# Altium PCB PCB1.PcbDoc
Units mil, origin at the board's own origin, x right, y up, seen from the top; angles counter-clockwise.
Board outline 1200 x 1400 mil, 2 copper layers (Top Layer, Bottom Layer); 43 components, 36 nets, 131 pads, 8 vias.
Unrouted connection lines stored in the file: 1.
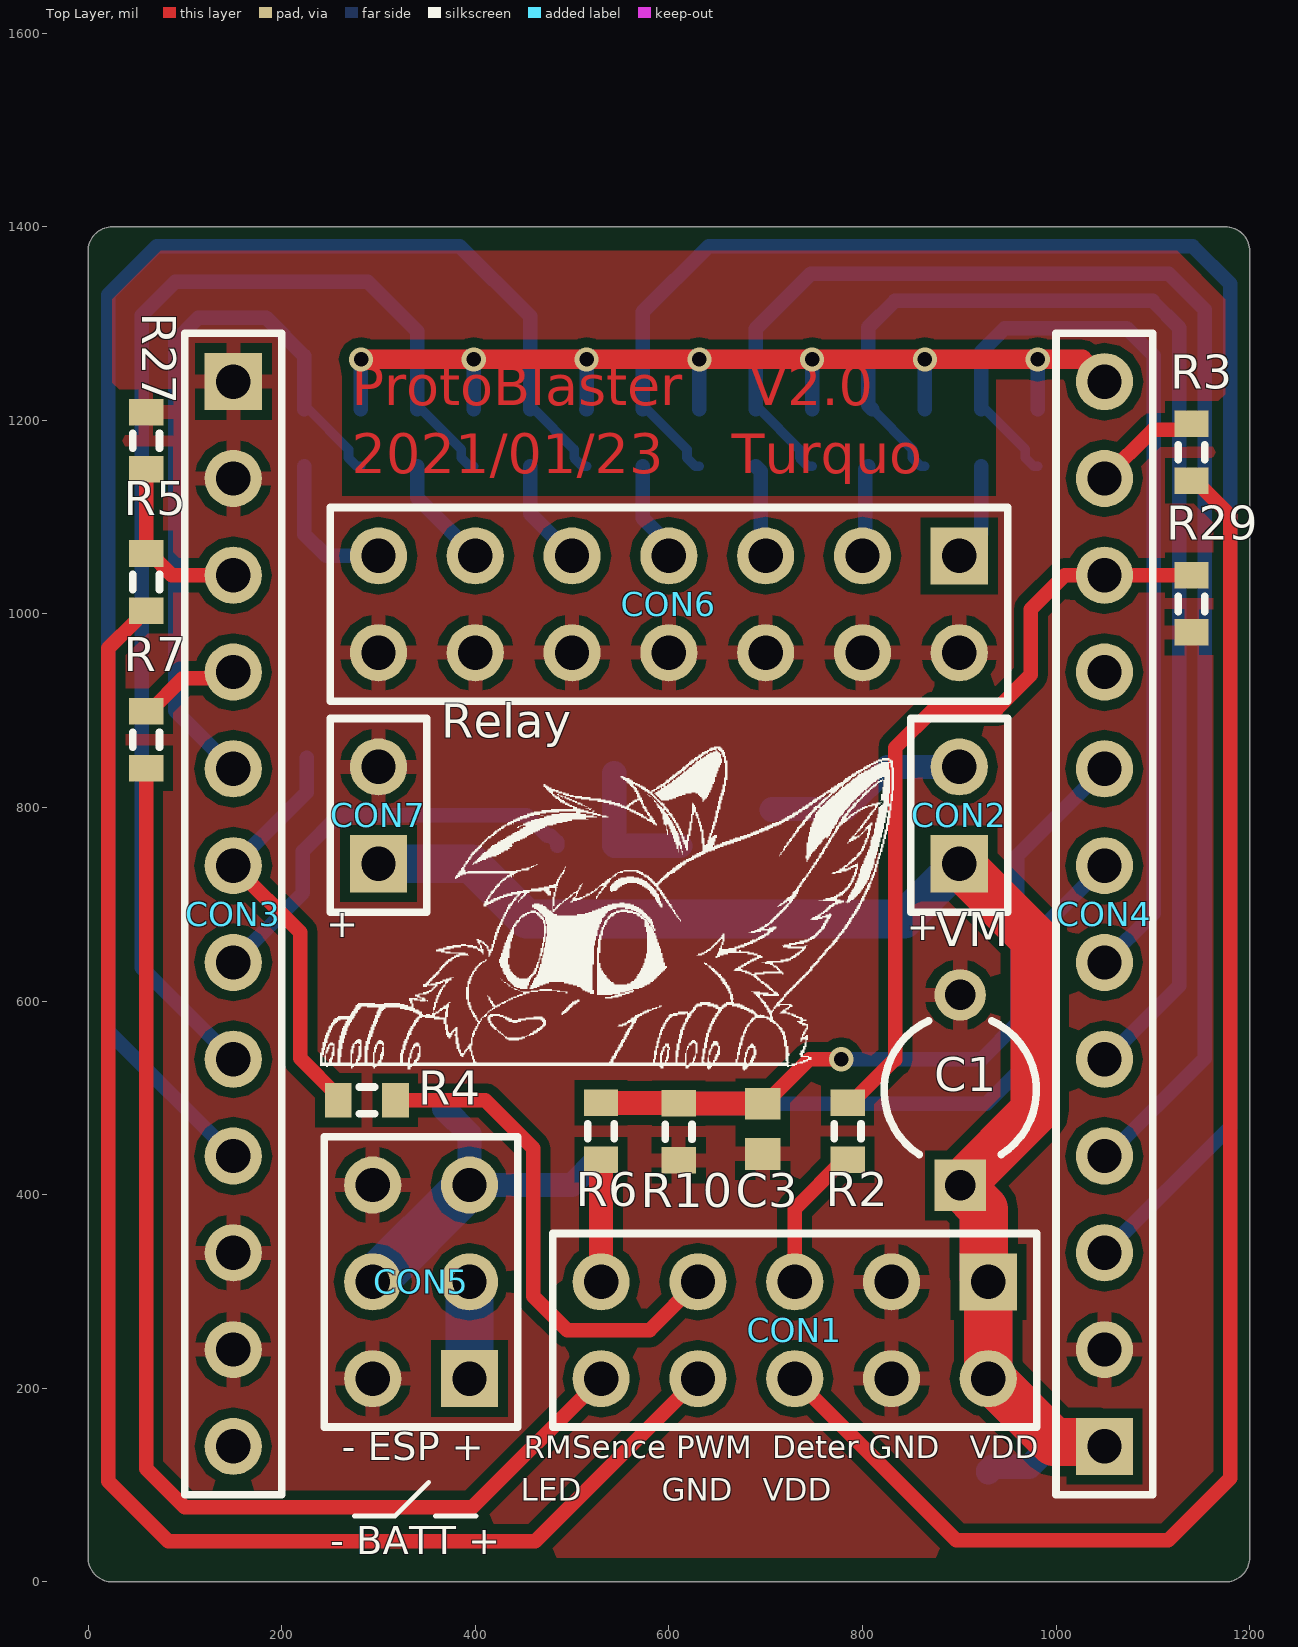
[diagram p0: Top Layer view]
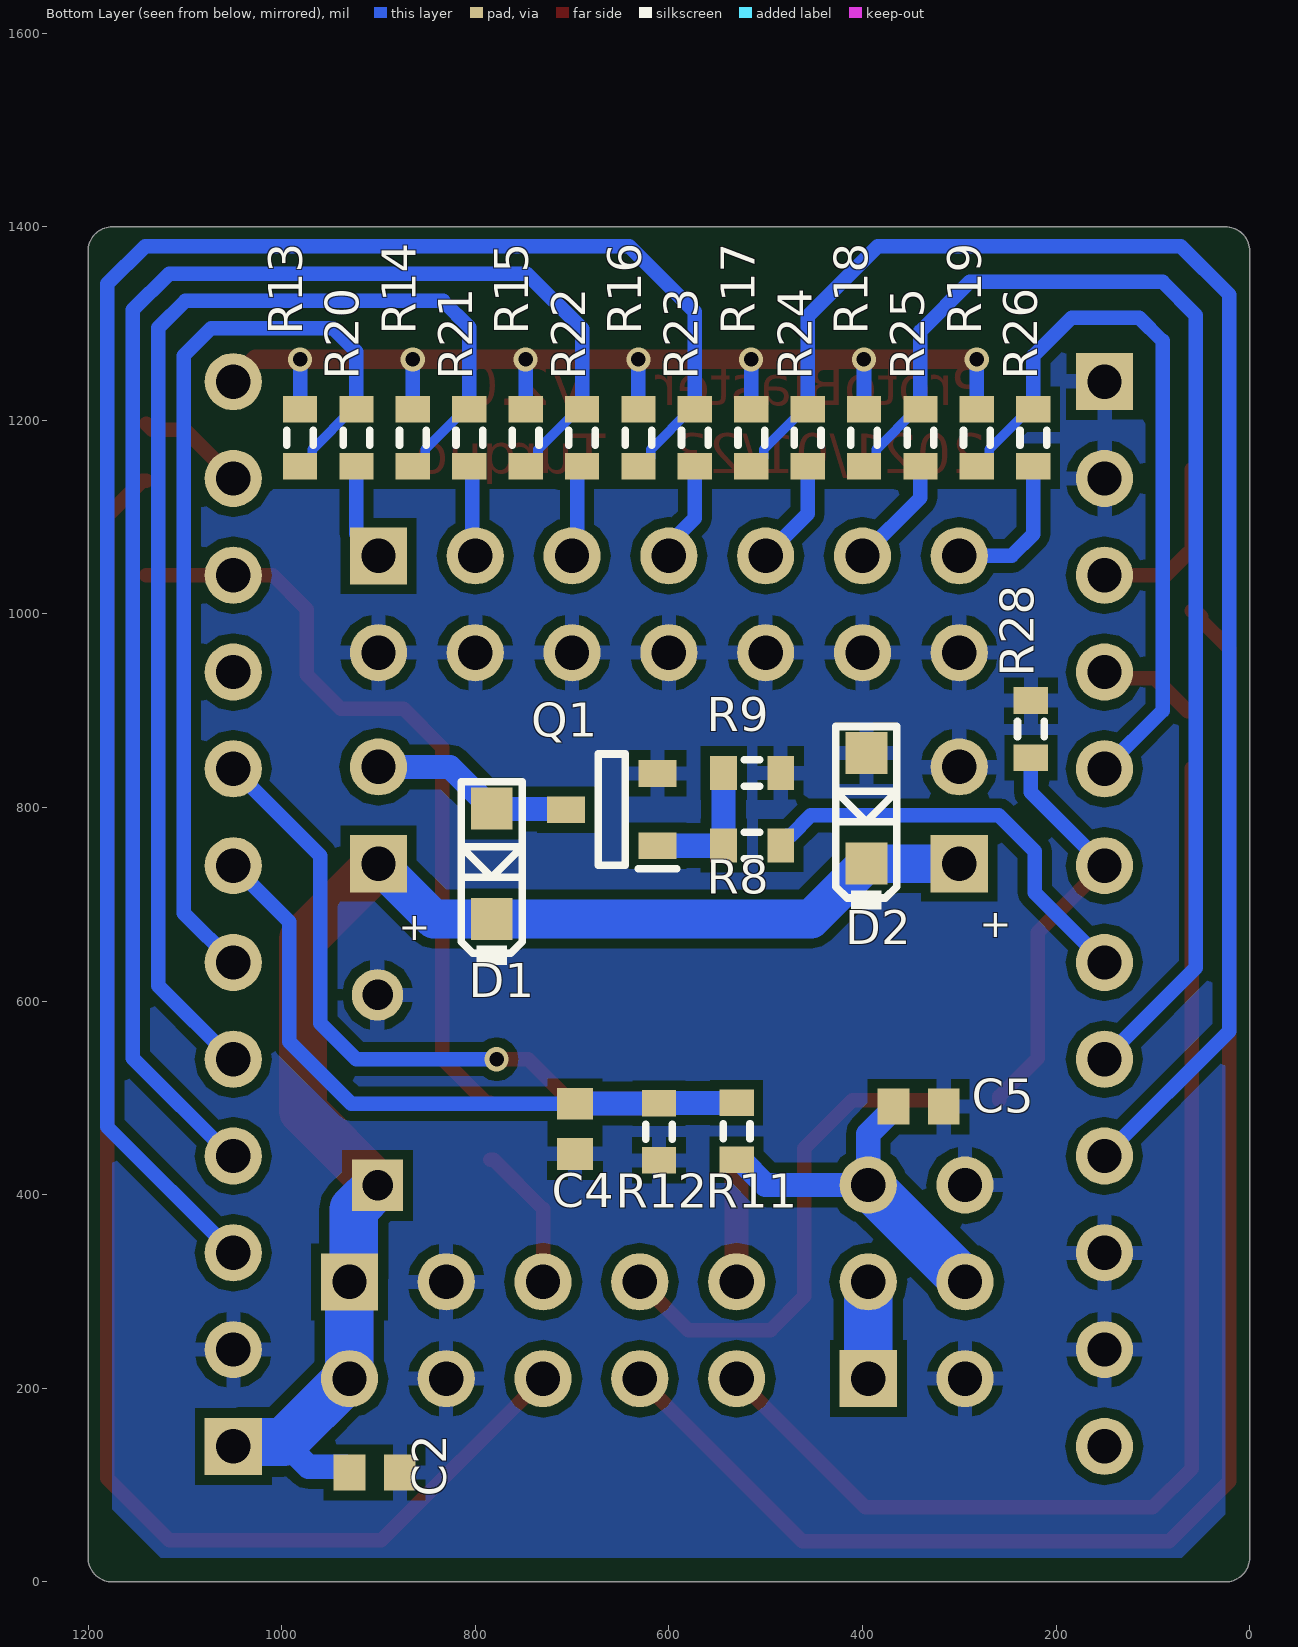
[diagram p1: Bottom Layer view, seen from below]

## Layer stack, top to bottom
Top Solder: solder mask 0.4, Solder Resist, Dk 3.5
Top Layer: signal copper 1.4
Dielectric 1: dielectric 12.6, FR-4, Dk 4.8
Bottom Layer: signal copper 1.4
Bottom Solder: solder mask 0.4, Solder Resist, Dk 3.5

## Board outline
25,0 cw(c25,25) 0,25 0,1375 cw(c25,1375) 25,1400 1175,1400 cw(c1175,1375) 1200,1375 1200,25 cw(c1175,25) 1175,0

## Design rules (kind name [scope] priority, off if disabled: settings)
Clearance [All] p1: gap=10 ignorepadtopadclearanceinfootprint=FALSE except(0: Arc-Hole Track-Hole SMDPad-Hole THPad-Hole Via-Hole Fill-Hole Poly-Hole Region-Hole Text-Hole)
PolygonConnect [All] p1: connectstyle=Relief reliefconductorwidth=15 reliefentries=4 polygonreliefangle="90 Angle" airgapwidth=10
RoutingVias [All] p1: holewidth=28 width=50 viastyle="Through Hole" minholewidth=28 minwidth=50 maxholewidth=28 maxwidth=50
SolderMaskExpansion [All] p1: expansion=4
Width [All] p1: maxlimit=100 minlimit=1 preferedwidth=30 minimp=50.000000 maximp=50.000000 favimp=50.000000
30 further rules are at their usual default settings.

## Components (designator, comment, footprint, x,y, rotation, side; value= is the part's Value field where it differs from the comment)
C1 "Cap2" CAPR5-4X5 901,508 r90 top value=2200pF/10V
C2 "104P" CAPC1608X90N 904,113 r180 bottom
C3 "104P" CAPC1608X90N 697,468 r270 top
C4 "104P" CAPC1608X90N 697,468 r270 bottom
C5 "104P" CAPC1608X90N 342,491 r180 bottom
CON1 "Blaster" HDR2X5 930,310 r180 top
CON2 "VM" HDR1X2 900,742 r90 top
CON3 "ESP32_L" HDR1X12 150,1240 r270 top locked
CON4 "ESP32_R" HDR1X12 1050,140 r90 top locked
CON5 "Battery" HDR2X3 394,210 r90 top
CON6 "Button" HDR2X7 900,1060 r180 top
CON7 "Relay" HDR1X2 300,742 r90 top
D1 "1N4007" D3216 783,684.83 r270 bottom
D2 "1N4007" D3216 396,742 r270 bottom
Q1 "BSS138" SOT95P240X120-3N 659,797.79 r0 bottom
R2 "Res3" J1-0603 784.69,465.53 r270 top value=100
R3 "Res3" J1-0603 1140,1167 r90 top value=100
R4 "Res3" J1-0603 288,497.57 r0 top value=100
R5 "Res3" J1-0603 60,1033 r90 top value=100
R6 "Res3" J1-0603 529.98,465.53 r270 top value=15K
R7 "Res3" J1-0603 60,870 r90 top value=100
R8 "Res3" J1-0603 514,760.79 r180 bottom value=1K
R9 "Res3" J1-0603 514,835.79 r180 bottom value=10K
R10 "Res3" J1-0603 610.17,465.06 r270 top value=1K
R11 "Res3" J1-0603 529.98,465.53 r270 bottom value=15K
R12 "Res3" J1-0603 610.17,465.06 r270 bottom value=1K
R13 "Res3" J1-0603 981,1182 r270 bottom value=10K
R14 "Res3" J1-0603 864.46,1182 r270 bottom value=10K
R15 "Res3" J1-0603 747.93,1182 r270 bottom value=10K
R16 "Res3" J1-0603 631.39,1182 r270 bottom value=10K
R17 "Res3" J1-0603 514.85,1182 r270 bottom value=10K
R18 "Res3" J1-0603 398.31,1182 r270 bottom value=10K
R19 "Res3" J1-0603 281.78,1182 r270 bottom value=10K
R20 "Res3" J1-0603 922.73,1182 r270 bottom value=100
R21 "Res3" J1-0603 806.19,1182 r270 bottom value=100
R22 "Res3" J1-0603 689.66,1182 r270 bottom value=100
R23 "Res3" J1-0603 573.12,1182 r270 bottom value=100
R24 "Res3" J1-0603 456.58,1182 r270 bottom value=100
R25 "Res3" J1-0603 340.05,1182 r270 bottom value=100
R26 "Res3" J1-0603 223.51,1182 r270 bottom value=100
R27 "Res3" J1-0603 60,1179 r90 top value=10K
R28 "Res3" J1-0603 226,881 r90 bottom value=10K
R29 "Res3" J1-0603 1140,1010.47 r270 top value=10K

## Footprints (in the part's own frame and the unit in brackets; to place one, negate y for a bottom-side part, rotate by r counter-clockwise, add the part's x,y. Pads: shape width x height; smd on the part's side, far side on the other; paste and mask are expansions set on the pad)
CAPC1608X90N [mm]
  rect 0.83x0.94 smd: 1(-0.66,0) 2(0.66,0)
  body extent -0.8,-0.4 0.8,0.4, height 0.9
CAPR5-4X5 [mm] "Capacitor; 2 Leads"
  rect 1.35x1.35 hole 0.8: 1(-2.5,0)
  round 1.35 hole 0.8: 2(2.5,0)
  silkscreen extent -1.69,-2 1.82,2
D3216 [mm]
  rect 1.1x1.1 smd: A(-2.9,0) K(0,0)
  silkscreen extent -3.6,-0.8 1.2,0.8
HDR1X2 [mm] "Connector; Header; 2 Position"
  rect 1.5x1.5 hole 0.9: 1(0,0)
  round 1.5 hole 0.9: 2(2.54,0)
  silkscreen extent -1.27,-1.27 3.81,1.27
HDR1X12 [mm] "Connector; Header; 12 Position"
  rect 1.5x1.5 hole 0.9: 1(0,0)
  round 1.5 hole 0.9: 2(2.54,0) 3(5.08,0) 4(7.62,0) 5(10.16,0) 6(12.7,0) 7(15.24,0) 8(17.78,0) 9(20.32,0) 10(22.86,0) 11(25.4,0) 12(27.94,0)
  silkscreen extent -1.27,-1.27 29.21,1.27
HDR2X3 [mm] "Connector; Header; 3x2 Position"
  rect 1.5x1.5 hole 0.9: 1(0,0)
  round 1.5 hole 0.9: 2(0,2.54) 3(2.54,0) 4(2.54,2.54) 5(5.08,0) 6(5.08,2.54)
  silkscreen extent -1.27,-1.27 6.35,3.81
HDR2X5 [mm] "Connector; Header; 5x2 Position"
  rect 1.5x1.5 hole 0.9: 1(0,0)
  round 1.5 hole 0.9: 2(0,2.54) 3(2.54,0) 4(2.54,2.54) 5(5.08,0) 6(5.08,2.54) 7(7.62,0) 8(7.62,2.54) 9(10.16,0) 10(10.16,2.54)
  silkscreen extent -1.27,-1.27 11.43,3.81
HDR2X7 [mm] "Connector; Header; 7x2 Position"
  rect 1.5x1.5 hole 0.9: 1(0,0)
  round 1.5 hole 0.9: 2(0,2.54) 3(2.54,0) 4(2.54,2.54) 5(5.08,0) 6(5.08,2.54) 7(7.62,0) 8(7.62,2.54) 9(10.16,0) 10(10.16,2.54) 11(12.7,0) 12(12.7,2.54) 13(15.24,0) 14(15.24,2.54)
  silkscreen extent -1.27,-1.27 16.51,3.81
J1-0603 [mm] "Chip Resistor, Body 1.6x0.8mm, IPC High Density"
  rect 0.7x0.9 smd: 1(-0.75,0) 2(0.75,0)
  silkscreen extent -0.2,-0.35 0.2,0.35, body extent -0.85,-0.48 0.85,0.48, height 0.9
SOT95P240X120-3N [mm]
  rect 1x0.7 smd: 1(-1.2,0.95) 2(-1.2,-0.95) 3(1.2,0)
  silkscreen extent -1.7,-1.46 0.35,1.55, body extent -1.2,-1.46 1.2,1.46, height 1.2

## Part data
C1: "Capacitor", PackageDescription="Capacitor; 2 Leads", PackageReference=CAPR5-4X5, Published=23-Sep-2002, Publisher="Altium Limited"
C2 C3 C4 C5: library part CC0603KRX7R7BB103, "Capacitor", Manufacturer_Name="YAGEO (PHYCOMP)", Mouser Part Number=603-CC603KRX7R7BB103, Arrow Part Number=CC0603KRX7R7BB103, Arrow Price/Stock=https://www.arrow.com/en/products/cc0603krx7r7bb103/yageo, Datasheet Link=http://www.yageo.com/documents/recent/UPY-GPHC_X7R_6.3V-to-50V_18.pdf, Height=0.9mm, Manufacturer_Part_Number=CC0603KRX7R7BB103, Mouser Price/Stock=https://www.mouser.co.uk/ProductDetail/Yageo/CC0603KRX7R7BB103?qs=5q%252BqlK8CmJRarFmz5k060w%3D%3D
CON1: library part "Header 5X2", "Header, 5-Pin, Dual row", LatestRevisionDate=17-Jul-2002, LatestRevisionNote="Re-released for DXP Platform.", Publisher="Altium Limited"
CON2 CON7: library part "Header 2", "Header, 2-Pin", LatestRevisionDate=17-Jul-2002, LatestRevisionNote="Re-released for DXP Platform.", Publisher="Altium Limited"
CON3 CON4: library part "Header 12", "Header, 12-Pin", LatestRevisionDate=17-Jul-2002, LatestRevisionNote="Re-released for DXP Platform.", Publisher="Altium Limited"
CON5: library part "Header 3X2", "Header, 3-Pin, Dual row", LatestRevisionDate=17-Jul-2002, LatestRevisionNote="Re-released for DXP Platform.", Publisher="Altium Limited"
CON6: library part "Header 7X2", "Header, 7-Pin, Dual row", LatestRevisionDate=17-Jul-2002, LatestRevisionNote="Re-released for DXP Platform.", Publisher="Altium Limited"
D1 D2: library part SMD-D
Q1: "MOSFET (N-Channel)", Manufacturer_Name="ON Semiconductor", Mouser Part Number=512-BSS138, Arrow Part Number=BSS138, Arrow Price/Stock=https://www.arrow.com/en/products/bss138/on-semiconductor, Datasheet Link=https://www.onsemi.com/pub/Collateral/BSS138-D.PDF, Height=1.2mm, Manufacturer_Part_Number=BSS138, Mouser Price/Stock=https://www.mouser.co.uk/ProductDetail/ON-Semiconductor-Fairchild/BSS138?qs=HK%252BeIG1iaahCeqBvjB4arg%3D%3D
R2 R3 R4 R5 R6 R7 R8 R9 R10 R11 R12 R13 R14 R15 R16 R17 R18 R19 R20 R21 R22 R23 R24 R25 R26 R27 R28 R29: "Resistor", LatestRevisionDate=29-May-2009, LatestRevisionNote="IPC-7351 Footprint Added.", PackageDescription="Chip Resistor", PackageReference=J1-0603, Published=8-Jun-2000, Publisher="Altium Limited"

## Via types
v1: diameter 25, hole 15, Top Layer to Bottom Layer, 8 vias

## Nets (pads, with @x,y where several pads share a name; then routed paths per layer and width w, separated by ;. In a path a pad name is that pad's centre, name@x,y a point inside that pad or via, vN(x,y) a via of type N, cw(c..) or ccw(c..) an arc to the next point about the centre after c; other vN are vias at no path point)
3V3: CON4.12 R13.1 R14.1 R15.1 R16.1 R17.1 R18.1 R19.1 | length 1138.2
  Top Layer w20: v1(282,1263) v1(398.5,1263) v1(515,1263) v1(631.5,1263) v1(748,1263) v1(864.5,1263) v1(981,1263) 1027,1263 CON4.12
  Bottom Layer w15: R19.1 281.89,1211.64 281.89,1262.89 v1(282,1263) ; R18.1 398.41,1211.62 398.41,1262.91 v1(398.5,1263) ; R17.1 514.93,1211.6 514.93,1262.93 v1(515,1263) ; R16.1 631.44,1211.58 631.44,1262.94 v1(631.5,1263) ; v1(748,1263) v1(748,1263) R15.1@747.96,1211.56 ; R14.1 v1(864.5,1263) ; R13.1 v1(981,1263) ; R15.1 R15.1@747.96,1211.56
ESP32_2_pwm: CON3.6 R4.1 R28.1 | length 430.3
  Top Layer w15: CON3.6 219,671 219,540.98 258.47,501.51 R4.1
  Bottom Layer w15: CON3.6 226,816 R28.1
ESP32_12_Encoder: CON3.9 R17.2 R24.1 | length 1613.5
  Bottom Layer w10: R24.1 460.52,1211.53 502.13,1169.91 502.13,1161.25 510.91,1152.47 R17.2
  Bottom Layer w15: CON3.9 21,569 21,1330 71,1380 384,1380 456.58,1307.42 R24.1
ESP32_13_Encoder: CON3.8 R18.2 R25.1 | length 1295.9
  Bottom Layer w10: R25.1 343.98,1211.53 385.6,1169.91 385.6,1161.25 394.38,1152.47 R18.2
  Bottom Layer w15: CON3.8 55.5,634.5 55.5,1308.5 90,1343 289,1343 340.05,1291.95 R25.1
ESP32_15_Vmotor: CON3.7 R8.2 | length 437.9
  Bottom Layer w15: CON3.7 222,712 222,755 259,792 453.26,792 474.26,771.01 478.19,771.01 484.47,764.73 R8.2
ESP32_17_trigger: CON3.5 R19.2 R26.1 | length 769.4
  Bottom Layer w10: R26.1 227.45,1211.53 269.06,1169.91 269.06,1161.25 277.84,1152.47 R19.2
  Bottom Layer w15: CON3.5 90,900 90,1282 114,1306 184,1306 223.51,1266.49 R26.1
ESP32_21_LED_pin: CON3.3 R5.2 R27.1 | length 186.3
  Top Layer w15: R27.1 R5.2 63.94,1062.53 86.46,1040 CON3.3
ESP32_22_SCL_reserved: CON3.4 R7.2 | length 106.8
  Top Layer w15: R7.2 63.94,899.53 97.97,933.56 143.56,933.56 CON3.4
ESP32_25_Return: CON4.5 R14.2 R21.1 | length 1302.5
  Bottom Layer w10: R21.1@810.13,1211.53 851.75,1169.91 851.75,1161.25 860.53,1152.47 R14.2
  Bottom Layer w15: R21.1@810.13,1211.53 806.19,1215.46 806.19,1296.19 833.33,1323.33 1099.67,1323.33 1127.33,1295.67 1127.33,616 1051.33,540 CON4.5
ESP32_26_X: CON4.4 R15.2 R22.1 | length 1592.9
  Bottom Layer w10: R22.1 693.59,1211.53 735.21,1169.91 735.21,1161.25 743.99,1152.47 R15.2
  Bottom Layer w15: R22.1 689.66,1294.66 746.67,1351.67 1116.33,1351.67 1153.67,1314.33 1153.67,541 1052.67,440 CON4.4
ESP32_27_Y: CON4.3 R16.2 R23.1 | length 1894.4
  Bottom Layer w10: R23.1 577.06,1211.53 618.67,1169.91 618.67,1161.25 627.45,1152.47 R16.2
  Bottom Layer w15: R23.1 573.12,1312.12 641,1380 1141,1380 1180,1341 1180,470 CON4.3
ESP32_32_Bettery_adc4: C4.1 CON4.7 R11.1 R12.1 | length 695
  Bottom Layer w15: C4.1 927.98,493.98 992,558 992,682 CON4.7
  Bottom Layer w25: R11.1 530.22,494.82 609.93,494.82 R12.1 610.46,494.28 696.7,494.28 C4.1
ESP32_33_Enter: CON4.6 R13.2 R20.1 | length 995.1
  Bottom Layer w10: R20.1 926.67,1211.53 968.28,1169.91 968.28,1161.25 977.06,1152.47 R13.2
  Bottom Layer w15: R20.1 922.73,1270.73 947,1295 1073,1295 1101,1267 1101,691 CON4.6
ESP32_36_reserved: CON4.11 R3.2 | length 113.7
  Top Layer w15: CON4.11@1050.24,1139.76 CON4.11 1100.25,1190.25 1133.72,1190.25 R3.2
ESP32_37_Deter_pin: CON4.10 R2.1 R29.1 | length 809.9
  Top Layer w15: R2.1 788.63,495.06 832.94,539.36 834,539.36 834,862 874,902 939,902 974,937 974,1005 1009,1040 CON4.10 R29.1
ESP32_38_reserved_input_only: CON4.9 | length 0.3
  Top Layer w15: CON4.9 CON4.9@1050.24,939.76
ESP32_39_Bettery_adc3: C3.1 CON4.8 R6.1 R10.1 | length 765.1
  Top Layer w15: C3.1 699.17,493.98 745.18,540 v1(778,540)
  Top Layer w25: R6.1 530.22,494.82 609.93,494.82 R10.1 610.46,494.28 696.7,494.28 C3.1
  Bottom Layer w15: v1(778,540) 923,540 960,577 960,750 CON4.8
ESP32_Bettery: C5.1 CON5.4 CON5.5 R11.2 | length 380
  Bottom Layer w25: C5.1 367.98,488.83 394,462.82 CON5.5 500.05,410 526.05,436 R11.2
  Bottom Layer w50: CON5.4 CON5.5
GND: C1.2 C2.2 C3.2 C4.2 C5.2 CON1.3 CON1.4 CON3.1 CON3.2 CON3.10 CON3.11 CON4.2 CON5.2 CON5.6 CON6.2 CON6.4 CON6.6 CON6.8 CON6.10 CON6.12 CON6.14 CON7.2 D2.A Q1.2 R9.2 R10.2 R12.2 R27.2 R28.2 R29.2
NetCON1_5: CON1.5 R2.2 | length 151
  Top Layer w15: CON1.5 730,385.25 780.75,436 R2.2
NetCON1_6: CON1.6 R3.1 | length 1595
  Top Layer w15: CON1.6 897,43 1116,43 1180,107 1180,1101.41 1143.94,1137.47 R3.1
NetCon1_7: CON1.7 R4.2 | length 521.2
  Top Layer w15: R4.2 410.43,497.57 460,448 460,295 495,260 580,260 CON1.7
NetCON1_8: CON1.8 R5.1 | length 1622.2
  Top Layer w15: R5.1 56.06,1003.47 49.78,997.19 49.78,993.26 21,964.47 21,104 83,42 462,42 CON1.8
NetCON1_10: CON1.10 R7.1 | length 1265.1
  Top Layer w15: R7.1 60,117 100,77 397,77 CON1.10
NetCON2_2: CON2.2 D1.A Q1.3 | length 212.1
  Bottom Layer w25: Q1.3 706.85,798.4 782.4,798.4 D1.A 826,842 CON2.2
NetCON5_1: CON5.1 CON5.3 | length 100
  Bottom Layer w50: CON5.1 CON5.3
NetCON6_1: CON6.1 R20.2 | length 101.9
  Bottom Layer w15: CON6.1 922.73,1082.73 R20.2
NetCON6_3: CON6.3 R21.2 | length 95
  Bottom Layer w15: CON6.3 803.1,1063.1 803.1,1149.38 R21.2
NetCON6_5: CON6.5 R22.2 | length 96.8
  Bottom Layer w15: R22.2 694.83,1147.3 694.83,1065.17 CON6.5
NetCON6_7: CON6.7 R23.2 | length 103.6
  Bottom Layer w15: R23.2 573.12,1098.8 600,1071.92 CON6.7
NetCON6_9: CON6.9 R24.2 | length 110.5
  Bottom Layer w15: R24.2 456.58,1103.42 CON6.9
NetCON6_11: CON6.11 R25.2 | length 117.3
  Bottom Layer w15: R25.2 340.05,1119.95 CON6.11
NetCON6_13: CON6.13 R26.2 | length 155.8
  Bottom Layer w15: R26.2 223.51,1082.49 246,1060 CON6.13
NetQ1_1: Q1.1 R8.1 R9.1 | length 143.4
  Bottom Layer w25: R9.1 R8.1 543.73,760.59 611.56,760.59 Q1.1
Remote_sence: CON1.9 R6.2 | length 121
  Top Layer w25: CON1.9 R6.2@529.99,430.99
VDD: C1.1 C2.1 CON1.1 CON1.2 CON2.1 CON4.1 CON7.1 D1.K D2.K | length 1847.4
  Top Layer w50: CON2.1 978,664 978,486.57 C1.1 925.47,385.1 925.47,314.53 CON1.1 CON1.2 932.45,210 997.92,144.53 1045.47,144.53 CON4.1
  Bottom Layer w25: C2.1 929.98,115.17 933.82,119 972.4,119 997.92,144.53
  Bottom Layer w40: CON7.1 D2.K 453.17,684.83 D1.K 842.83,684.83 CON2.1
  Bottom Layer w50: C1.1 925.47,385.1 925.47,314.53 CON1.1 CON1.2 932.45,210 997.92,144.53 1045.47,144.53 CON4.1
pads on no net: CON3.12

## Polygon pours and split planes (outlines as drawn)
GND on Bottom Layer "Bottom Layer-GND" (solid, pour order 8): 25,1325 75,1375 1125,1375 1175,1325 1175,75 1125,25 70,25 25,70
GND on Top Layer "Top Layer-GND" (solid, pour order 6): 25,1325 75,1375 1125,1375 1175,1325 1175,75 1125,25 75,25 25,75

## Other copper
Top Layer:
  pour cut-out: 267.5,1240 932.5,1240 932.5,1125 267.5,1125
  pour cut-out: 230,1566
  text "ProtoBlaster    V2.0 / 2021/01/23    Turquo" at 272.5,1132 h70

## Silkscreen, mask and mechanical layers (free items; w line width, h text height)
Top Overlay:
  drawing of 8 lines, arcs and shapes, not listed
  text "+" at 246,656 h50
  text "+" at 846,653 h50
  text "RMSence PWM  Deter GND   VDD" at 450,120 h40
  text "- ESP +" at 262,116 h50
  text "LED        GND   VDD" at 447,76 h40
  text "- BATT +" at 250,19 h50
Bottom Overlay:
  text "+" at 246,656 h50
  text "+" at 846,653 h50
Top Solder:
  drawing of 11 lines, arcs and shapes, not listed
  text "ProtoBlaster    V2.0 / 2021/01/23    Turquo" at 272.5,1132 h70
Mechanical 1:
  the board outline again, w5